# EAGLE board AAT1217_BREAKOUT (EAGLE 7.2.0)
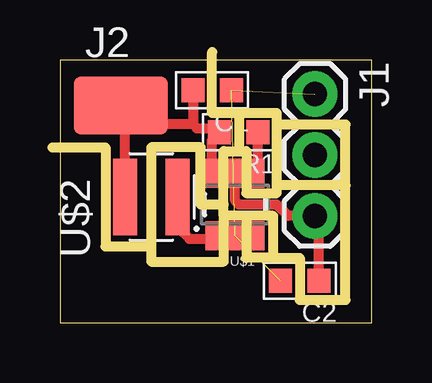
[diagram p0: board, top side]

Size 13.01 x 10.94 mm. Coordinates in mm from the lower left corner, seen from the top.
Outline: 0,0 13.01,0 13.01,10.94 0,10.94 0,0
Copper layers (1*16): Top 0.035mm / dielectric 1.5mm / Bottom 0.035mm
Design rules "default": minimum track width 10mil, minimum drill 24mil, track to track 8mil, track to pad 8mil, pad to pad 8mil, via to via 8mil, smd to smd 8mil, copper to edge 40mil, drill to drill 8mil, minimum pad ring 10mil, minimum via ring 8mil, stop-mask expansion 4mil, vias tented up to drill 0mil, thermal gap 10mil
Milling: 35 lines

## Footprints (pad centres in the part's own frame; a part is rotated, then mirrored left to right if it is on the bottom)
C0603-N = smd 0.95 x 1: 1 -0.8,0; 2 0.8,0
1X03 = drill 1.016 pad 1.88: 1 0,0; 2 2.54,0; 3 5.08,0
LUXEON-PAD = smd 3.9 x 2.4: P$1 0,0
R0603-N = smd 0.95 x 1: 1 -0.8,0; 2 0.8,0
SOT23-6 = smd 0.55 x 1.2: 1 0.95,1.3; 2 0,1.3; 3 -0.95,1.3; 4 -0.95,-1.3; 5 0,-1.3; 6 0.95,-1.3
WURTH_10UH_650MA = smd 3.2 x 1: P$1 0,-1.1; P$2 0,1.1

## Placement (x,y rotation side)
C1  [C0603-N]  6.35,9.68 180 top
C2  [C0603-N]  10,1.75 180 top
J1  [1X03]  10.64,9.53 270 top
J2  [LUXEON-PAD]  2.54,9.05 0 top
R1  [R0603-N]  7.46,7.94 180 top
U$1  AAT1217  [SOT23-6]  7.3,4.92 180 top
U$2  INDUCTORS_WURTH  [WURTH_10UH_650MA]  3.81,5.24 90 top

## Library data of the parts
C1 C2 R1 = passives-7351
J1 J2 = SparkFun-Connectors
U$1 U$2 = _my-parts

## Nets
GND: C1.1 C2.2 J1.1 U$1.2
N$1: R1.1 U$1.4
N$2: C1.2 J2.P$1 R1.2 U$1.6 U$2.P$2
N$4: U$1.1 U$2.P$1
N$8: J1.2
VOUT: C2.1 J1.3 U$1.5

## Tracks (layer width: path | path; a pad name or v marks a point on that pad's centre or on a via)
GND  (3 unrouted)
N$1
  Top 0.406: U$1.4 R1.1
N$2
  Top 0.406: U$1.6 6.35,7.63 R1.2 6.5,8.1 5.71,8.1 5.55,8.26 | C1.2 5.55,8.26 | U$2.P$2 2.71,8.57 | 2.71,8.57 2.71,8.88 J2.P$1 | 5.55,8.26 3.02,8.26 2.71,8.57
N$4
  Top 0.406: U$2.P$1 4.91,3.98 5.4,3.49 6.22,3.49 U$1.1
VOUT
  Top 0.406: C2.1 10.8,4.28 J1.3 9.53,4.45 9.05,4.92 7.46,4.92 7.3,5.08 U$1.5